# EAGLE board interfaz_LCD (EAGLE 6.1)
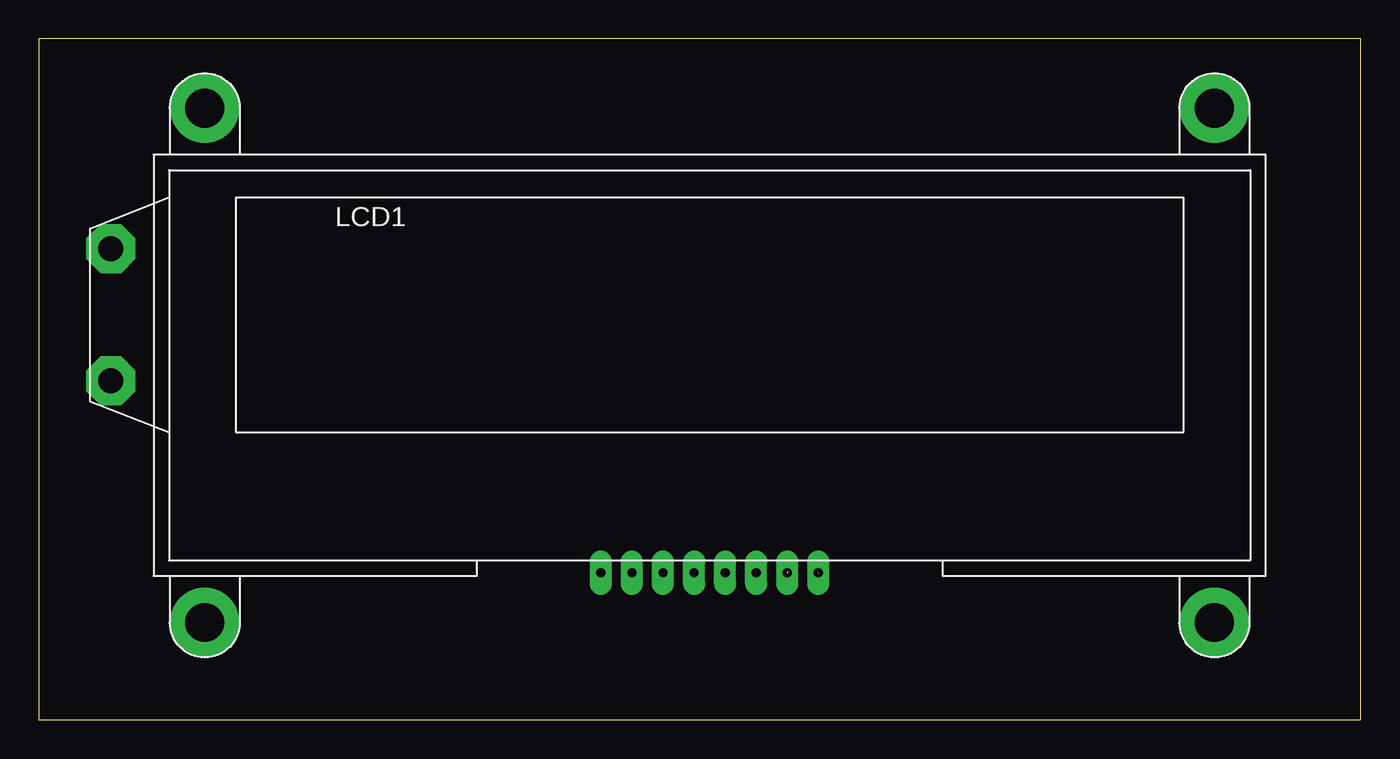
[diagram p0: board, top side]
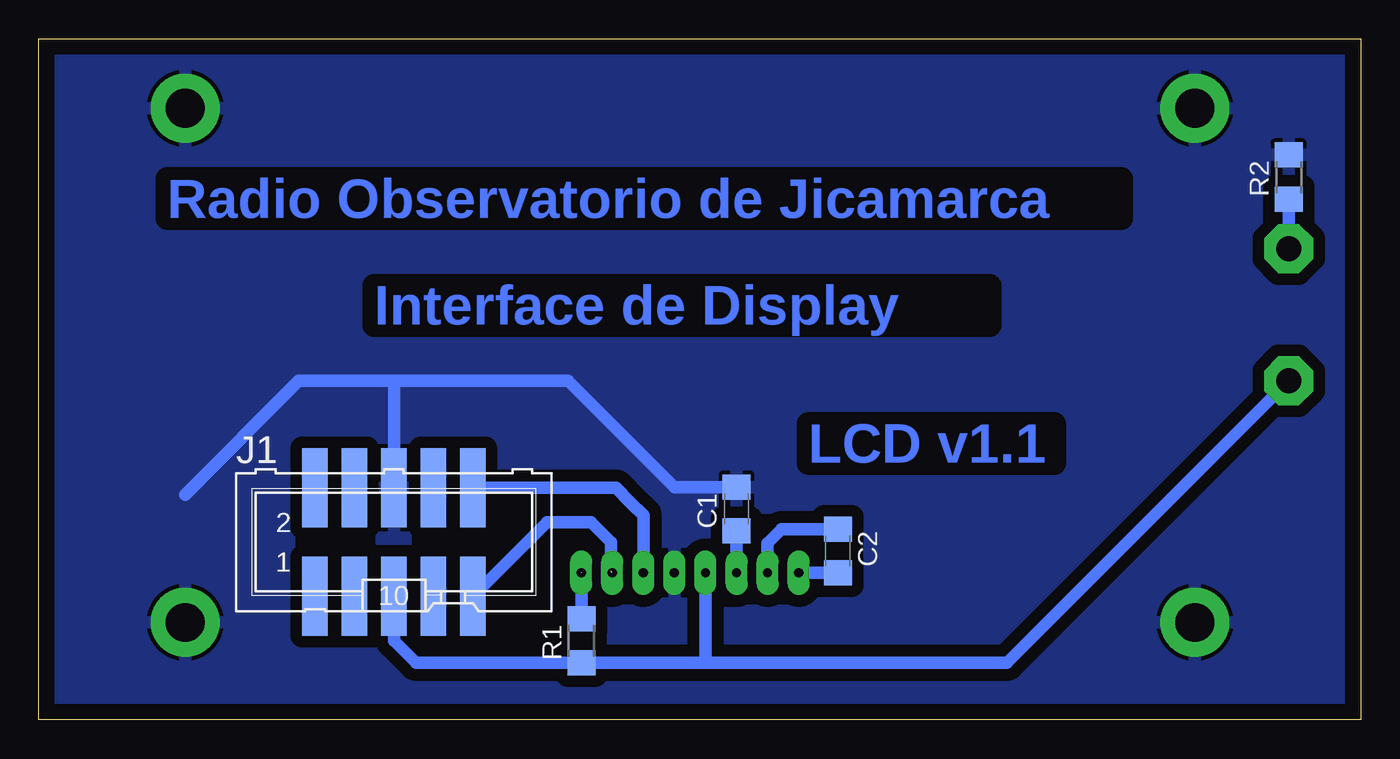
[diagram p1: board, bottom side, seen from below]

Size 85.09 x 43.81 mm. Coordinates in mm from the lower left corner, seen from the top.
Outline: 0,0 85.09,0 85.09,43.81 0,43.81 0,0
Copper layers (1*16): Top 0.035mm / dielectric 1.5mm / Bottom 0.035mm
Design rules: minimum track width 10mil, minimum drill 24mil, track to track 8mil, track to pad 8mil, pad to pad 8mil, via to via 8mil, smd to smd 8mil, copper to edge 40mil, drill to drill 8mil, minimum pad ring 10mil, minimum via ring 8mil, stop-mask expansion 4mil, vias tented up to drill 0mil, thermal gap 10mil

## Footprints (pad centres in the part's own frame; a part is rotated, then mirrored left to right if it is on the bottom)
C1206 = smd 1.6 x 1.8: 1 -1.4,0; 2 1.4,0
ML10L = smd 1.651 x 5.08: 1 -5.08,-3.493; 2 -5.08,3.493; 3 -2.54,-3.493; 4 -2.54,3.493; 5 0,-3.493; 6 0,3.493; 7 2.54,-3.493; 8 2.54,3.493; 9 5.08,-3.493; 10 5.08,3.493
LCD_NHD = drill 1.6 pad 3.175 octagon: A -38.55,11.65; K -38.55,20.15 | drill 2.5 pad 4.445: G1 -32.5,29.2; G2 32.5,29.2; G3 -32.5,-3.9; G4 32.5,-3.9 | drill 0.6 pad 1.422 long: P1 7,-0.7; P2 5,-0.7; P3 3,-0.7; P4 1,-0.7; P5 -1,-0.7; P6 -3,-0.7; P7 -5,-0.7; P8 -7,-0.7
R1206 = smd 1.6 x 1.803: 1 -1.422,0; 2 1.422,0

## Placement (x,y rotation side)
C1  1u  [C1206]  40.18,13.57 90 bottom
C2  1u  [C1206]  33.66,10.86 270 bottom
J1  ML10L  [ML10L]  62.23,11.43 0 bottom
LCD1  [LCD_NHD]  43.18,10.16 0 top
R1  10K  [R1206]  50.16,5.08 90 bottom
R2  0  [R1206]  4.63,34.92 90 bottom

## Library data of the parts
C1 C2 R1 R2 = rcl
J1 LCD1 = adbm2013

## Nets
+3V3: J1.5 LCD1.A LCD1.P5 R1.1
GND: C1.2 J1.6 LCD1.G1 LCD1.G2 LCD1.G3 LCD1.G4 LCD1.P4 R2.2
N$3: LCD1.P1 R1.2
N$4: LCD1.K R2.1
N$5: C1.1 LCD1.P6
N$6: C2.1 LCD1.P7
N$7: C2.2 LCD1.P8
SCL: J1.9 LCD1.P2
SDA: J1.10 LCD1.P3

## Tracks (layer width: path | path; a pad name or v marks a point on that pad's centre or on a via)
+3V3
  Bottom 0.813: 42.18,3.66 22.78,3.66 LCD1.A | J1.5 62.23,5.08 60.81,3.66 R1.1 42.18,3.66 | LCD1.P5 42.18,3.66
GND
  Bottom 0.813: 62.23,21.81 J1.6 | 62.23,21.81 68.36,21.81 75.68,14.49 | C1.2 44.18,14.97 51.02,21.81 62.23,21.81
  pour Bottom (isolate 0.762): 1.27,44.45 0,-1.27 86.36,-1.27 86.36,44.45
N$3  (1 unrouted)
  Bottom 0.813: R1.2 50.16,9.46
N$4
  Bottom 0.813: LCD1.K R2.1
N$5
  Bottom 0.813: LCD1.P6 C1.1
N$6
  Bottom 0.813: C2.1 37.27,12.26 38.18,11.35 LCD1.P7
N$7
  Bottom 0.813: C2.2 LCD1.P8
SCL  (1 unrouted)
  Bottom 0.813: 48.26,9.54 48.26,11.43 49.53,12.7 52.39,12.7 J1.9
SDA
  Bottom 0.813: J1.10 47.94,14.92 46.99,13.97 46.18,13.16 LCD1.P3

## Text on the board
Bottom: Radio Observatorio de Jicamarca | Interface de Display | LCD v1.1